# EAGLE board 5x5_printout (EAGLE 7.2.0)
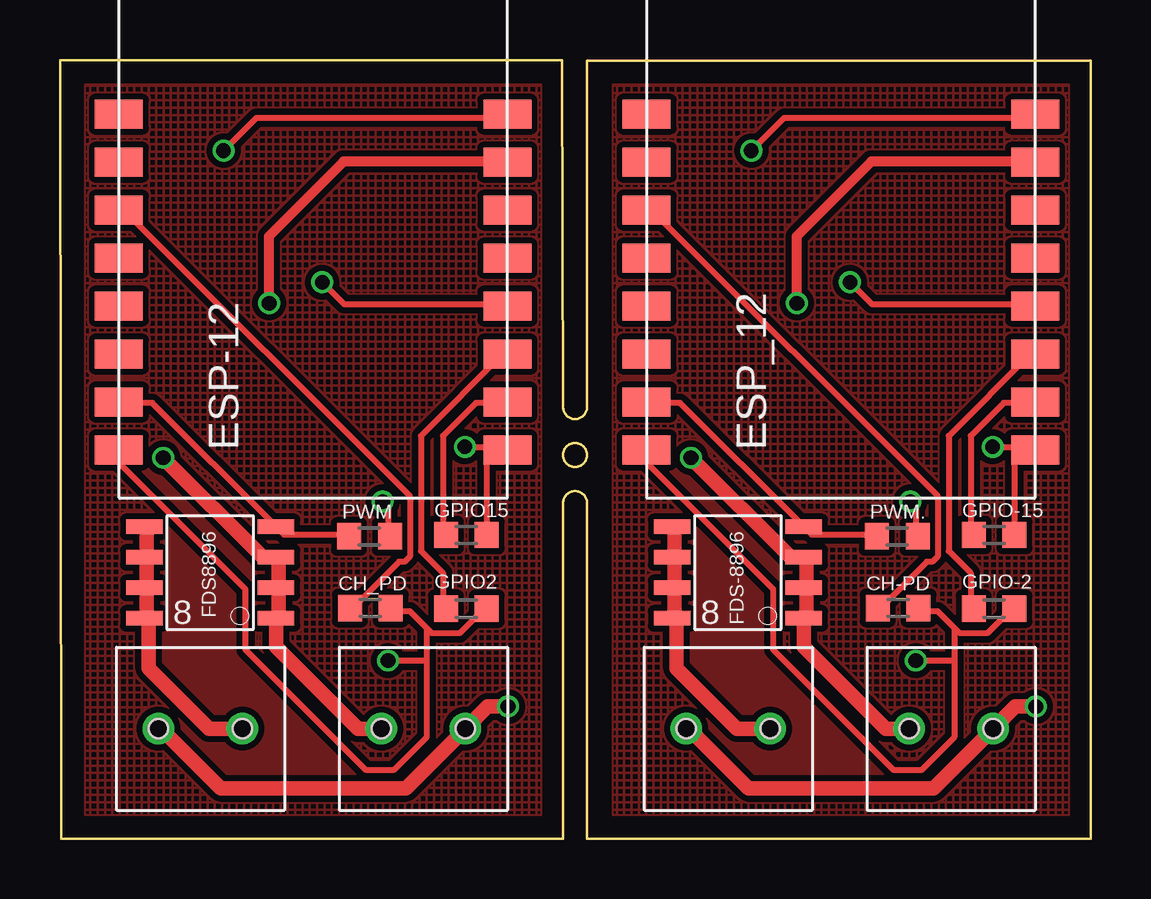
[diagram p0: board, top side]
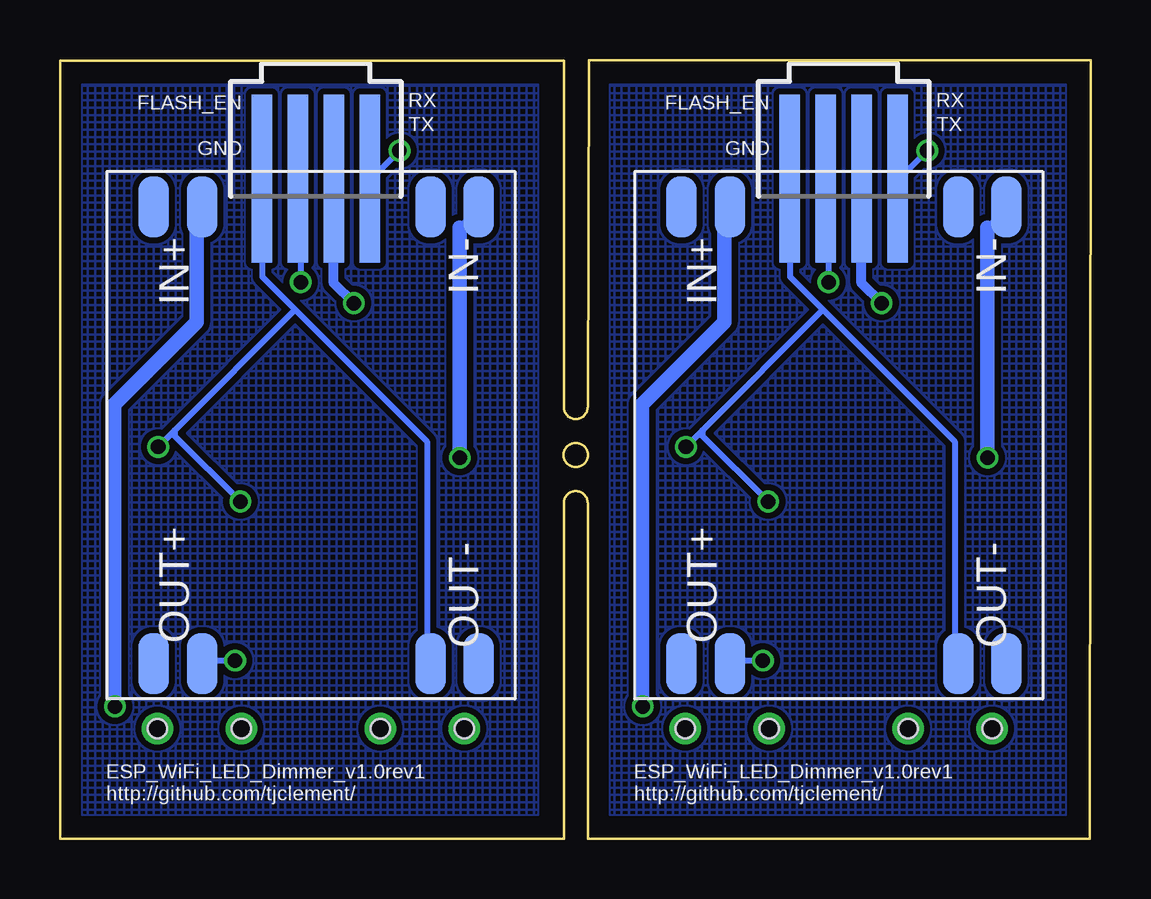
[diagram p1: board, bottom side, seen from below]

Size 42.97 x 32.47 mm. Coordinates in mm from the lower left corner, seen from the top.
Outline: 0.05,0 20.97,0 20.97,14 arc-180 21.97,14 21.97,0 42.97,0 42.97,32.43 21.97,32.43 21.97,18 arc-180 20.97,18 20.92,32.47 0,32.47 0.05,0
Outline: circle at 21.47,16 radius 0.5
Copper layers (1*16): Top 0.035mm / dielectric 1.5mm / Bottom 0.035mm
Design rules "dirt_cheap_dirty_boards.v1": minimum track width 5mil, minimum drill 12mil, track to track 5mil, track to pad 5mil, pad to pad 5mil, via to via 5mil, smd to smd 0mil, copper to edge 10mil, drill to drill 10mil, minimum pad ring 10mil, minimum via ring 6mil, stop-mask expansion 2mil, vias tented up to drill 25mil, thermal gap 10mil

## Footprints (pad centres in the part's own frame; a part is rotated, then mirrored left to right if it is on the bottom)
KF350-2P = drill 0.8: 1 -1.75,0; 2 1.75,0 | hole 0.8: -1.75,0; 1.75,0
R0603 = smd 1 x 1.1: 1 -0.85,0; 2 0.85,0
CN1594 = smd 2.54 x 1.27: IN+(1) -9.525,-4.547; IN+(2) -9.525,-6.553; IN-(1) -9.525,6.985; IN-(2) -9.525,4.978; OUT+(1) 9.525,-4.547; OUT+(2) 9.525,-6.553; OUT-(1) 9.525,6.985; OUT-(2) 9.525,4.978
ESP8266-ESP12 = smd 2 x 1.2: 1 16.2,2; 2 16.2,4; 3 16.2,6; 4 16.2,8; 5 16.2,10; 6 16.2,12; 7 16.2,14; 8 16.2,16; 9 0,16; 10 0,14; 11 0,12; 12 0,10; 13 0,8; 14 0,6; 15 0,4; 16 0,2
SO-8 = smd 1.524 x 0.61: 1 -2.743,1.905; 2 -2.743,0.635; 3 -2.743,-0.635; 4 -2.743,-1.905; 5 2.743,-1.905; 6 2.743,-0.635; 7 2.743,0.635; 8 2.743,1.905
87438-04 = smd 7 x 0.85: 1 0,2.25; 2 0,0.75; 3 0,-0.75; 4 0,-2.25

## Placement (x,y rotation side)
12V_IN  KF350-P2  [KF350-2P]  15.15,4.59 0 top
12V_IN1  KF350-P2  [KF350-2P]  37.15,4.59 0 top
CH-PD  10k  [R0603]  34.94,9.62 0 top
CH_PD  10k  [R0603]  12.94,9.62 0 top
DC_CONVERTER  CN1594THROUGH-HOLE  [CN1594]  10.51,16.82 270 bottom
DC_CONVERTER1  CN1594THROUGH-HOLE  [CN1594]  32.5,16.82 270 bottom
ESP-12  ESP8266_ESP-12  [ESP8266-ESP12]  2.45,14.21 0 top
ESP_12  ESP8266_ESP-12  [ESP8266-ESP12]  24.45,14.21 0 top
FDS8896  [SO-8]  6.26,11.1 180 top
FDS-8896  [SO-8]  28.26,11.1 180 top
GPIO2  10k  [R0603]  16.94,9.6 0 top
GPIO15  10k  [R0603]  16.94,12.67 0 top
GPIO-2  10k  [R0603]  38.94,9.6 0 top
GPIO-15  10k  [R0603]  38.94,12.67 0 top
LED  KF350-P2  [KF350-2P]  5.86,4.59 0 top
LED1  KF350-P2  [KF350-2P]  27.86,4.59 0 top
PROG  [87438-04]  10.31,27.53 270 bottom  (not fitted)
PROG1  [87438-04]  32.3,27.53 270 bottom  (not fitted)
PWM  10k  [R0603]  12.9,12.61 0 top
PWM.  10k  [R0603]  34.9,12.61 0 top

## Library data of the parts
12V_IN 12V_IN1 LED LED1 = KF350-P2
CH-PD CH_PD GPIO2 GPIO15 GPIO-2 GPIO-15 PWM PWM. = rcl
DC_CONVERTER DC_CONVERTER1 = CN1594_smd
ESP-12 ESP_12 = ESP8266-ESP12
FDS8896 FDS-8896 = transistor-fet
PROG PROG1 = con-molex; OC_FARNELL: unknown; OC_NEWARK: unknown

## Nets
N$1: CH_PD.2 DC_CONVERTER.OUT+(1) ESP-12.16 GPIO2.2
N$2: CH_PD.1 ESP-12.11
N$3: ESP-12.3 GPIO2.1
N$4: FDS8896.5 FDS8896.6 FDS8896.7 FDS8896.8 LED.2
N$5: ESP-12.8 PROG.1
N$6: DC_CONVERTER.OUT-(2) ESP-12.1 GPIO15.2 PROG.4 PWM.2
N$7: ESP-12.2 GPIO15.1
N$8: ESP-12.7 PROG.2
N$9: ESP-12.4 PROG.3
N$10: 12V_IN.1 DC_CONVERTER.IN-(1) FDS8896.1 FDS8896.2 FDS8896.3
N$11: CH-PD.2 DC_CONVERTER1.OUT+(1) ESP_12.16 GPIO-2.2
N$12: 12V_IN.2 DC_CONVERTER.IN+(1) LED.1
N$13: CH-PD.1 ESP_12.11
N$14: ESP_12.3 GPIO-2.1
N$15: DC_CONVERTER1.OUT-(2) ESP_12.1 GPIO-15.2 PROG1.4 PWM..2
N$16: ESP_12.2 GPIO-15.1
N$17: FDS-8896.5 FDS-8896.6 FDS-8896.7 FDS-8896.8 LED1.2
N$18: 12V_IN1.1 DC_CONVERTER1.IN-(1) FDS-8896.1 FDS-8896.2 FDS-8896.3
N$19: 12V_IN1.2 DC_CONVERTER1.IN+(1) LED1.1
N$20: ESP_12.8 PROG1.1
N$21: ESP_12.7 PROG1.2
N$22: ESP_12.4 PROG1.3
S$2: ESP-12.15 FDS8896.4 PWM.1
S$6: ESP_12.15 FDS-8896.4 PWM..1

## Tracks (layer width: path | path; a pad name or v marks a point on that pad's centre or on a via)
N$1  (via drill 0.61)
  Top 0.254: 15.28,8.8 15.51,8.57 16.65,8.57 17.56,9.49 GPIO2.2 | 15.28,8.8 14.59,9.49 13.91,9.49 CH_PD.2 | 15.28,8.8 15.28,7.43 | 15.28,7.43 15.28,4.23 13.91,2.86 12.76,2.86 7.73,7.88 7.73,10.4 2.47,15.66 2.47,16.11 ESP-12.16 | 15.28,7.43 v13.68,7.43
  Bottom 0.254: v13.68,7.43 15.05,7.43 DC_CONVERTER.OUT+(1)
N$2
  Top 0.254: CH_PD.1 12.31,9.71 14.13,11.54 14.36,11.54 14.59,11.77 14.59,14.29 2.47,26.4 ESP-12.11
N$3
  Top 0.254: GPIO2.1 15.96,9.71 15.96,11.09 15.05,12 15.05,16.8 18.48,20.23 ESP-12.3
N$4
  Top 0.254: 3.62,9.26 FDS8896.8 | 3.62,10.4 FDS8896.7 3.62,10.63 | 3.62,11.54 FDS8896.6 3.62,11.77 | 3.62,12.91 FDS8896.5
  Top 0.61: 3.62,10.4 3.62,9.26 | 3.62,10.63 3.62,11.54 | 3.62,11.77 3.62,12.91 | LED.2 6.22,4.59 3.7,7.11 3.7,9.01 FDS8896.8
N$5  (via drill 0.61)
  Top 0.254: v6.82,28.69 8.19,30.06 18.48,30.06 ESP-12.8
  Bottom 0.254: v6.82,28.69 7.96,27.55 PROG.1
N$6  (via drill 0.61)
  Top 0.254: v16.88,16.34 17.79,16.34 | 17.79,16.34 18.48,16.34 ESP-12.1 17.79,16.34 | 17.79,16.34 17.79,12.69 GPIO15.2 | v13.45,14.06 13.68,13.83 13.68,12.69 PWM.2
  Bottom 0.254: 11.16,22.06 12.53,23.43 12.53,27.32 PROG.4 | 11.16,22.06 5.68,16.57 5.68,7.43 DC_CONVERTER.OUT-(2) | 11.16,22.06 16.19,17.03 | 16.19,17.03 v16.88,16.34 | v13.45,14.06 16.19,16.8 16.19,17.03
N$7
  Top 0.254: GPIO15.1 15.96,12.69 15.96,16.8 17.33,18.17 18.48,18.17 ESP-12.2
N$8  (via drill 0.61)
  Top 0.254: 18.48,28.23 ESP-12.7
  Top 0.406: 18.48,28.23 11.82,28.23 8.7,25.11 8.7,22.35 v8.72,22.33
  Bottom 0.254: 9.56,30.52 9.56,27.55 PROG.2
  Bottom 0.406: v8.72,22.33 9.56,23.17 PROG.2
N$9  (via drill 0.61)
  Top 0.254: v10.93,23.2 11.85,22.29 18.48,22.29 ESP-12.4
  Bottom 0.254: v10.93,23.2 10.93,27.32 PROG.3
N$10  (via drill 0.61)
  Top 0.254: 9.11,9.26 FDS8896.1 | 9.11,10.4 FDS8896.2 9.11,10.63 | 9.11,11.54 FDS8896.3 8.88,11.77 8.42,11.77
  Top 0.61: 9.11,10.4 9.11,9.26 | 9.11,10.63 9.11,11.54 | v4.3,15.89 8.42,11.77 | 12V_IN.1 12.42,4.59 9,8.01 FDS8896.1
  Bottom 0.254: 4.3,25.49 3.62,26.17 DC_CONVERTER.IN-(1)
  Bottom 0.61: 4.3,25.49 v4.3,15.89
N$11  (via drill 0.61)
  Top 0.254: 37.28,8.8 37.51,8.57 38.65,8.57 39.56,9.49 GPIO-2.2 | 37.28,8.8 36.59,9.49 35.9,9.49 CH-PD.2 | 37.28,8.8 37.28,7.43 | 37.28,7.43 37.28,4.23 35.9,2.86 34.76,2.86 29.73,7.88 29.73,10.4 24.48,15.66 24.48,16.11 ESP_12.16 | 37.28,7.43 v35.68,7.43
  Bottom 0.254: v35.68,7.43 37.05,7.43 DC_CONVERTER1.OUT+(1)
N$12  (via drill 0.61)
  Top 0.61: LED.1 4.22,4.59 6.7,2.11 14.42,2.11 12V_IN.2 17.82,5.51 v18.68,5.51
  Bottom 0.254: 15.28,26.17 DC_CONVERTER.IN+(1)
  Bottom 0.61: 15.28,26.17 15.28,21.53 18.7,18.11 18.7,5.74 v18.68,5.51
N$13
  Top 0.254: CH-PD.1 34.3,9.71 36.13,11.54 36.36,11.54 36.59,11.77 36.59,14.29 24.48,26.4 ESP_12.11
N$14
  Top 0.254: GPIO-2.1 37.96,9.71 37.96,11.09 37.05,12 37.05,16.8 40.48,20.23 ESP_12.3
N$15  (via drill 0.61)
  Top 0.254: v38.88,16.34 39.79,16.34 | 39.79,16.34 40.48,16.34 ESP_12.1 39.79,16.34 | 39.79,16.34 39.79,12.69 GPIO-15.2 | v35.45,14.06 35.68,13.83 35.68,12.69 PWM..2
  Bottom 0.254: 33.16,22.06 34.53,23.43 34.53,27.32 PROG1.4 | 33.16,22.06 27.68,16.57 27.68,7.43 DC_CONVERTER1.OUT-(2) | 33.16,22.06 38.19,17.03 | 38.19,17.03 v38.88,16.34 | v35.45,14.06 38.19,16.8 38.19,17.03
N$16
  Top 0.254: GPIO-15.1 37.96,12.69 37.96,16.8 39.33,18.17 40.48,18.17 ESP_12.2
N$17
  Top 0.254: 25.62,9.26 FDS-8896.8 | 25.62,10.4 FDS-8896.7 25.62,10.63 | 25.62,11.54 FDS-8896.6 25.62,11.77 | 25.62,12.91 FDS-8896.5
  Top 0.61: 25.62,10.4 25.62,9.26 | 25.62,10.63 25.62,11.54 | 25.62,11.77 25.62,12.91 | LED1.2 28.22,4.59 25.7,7.11 25.7,9.01 FDS-8896.8
N$18  (via drill 0.61)
  Top 0.254: 31.11,9.26 FDS-8896.1 | 31.11,10.4 FDS-8896.2 31.11,10.63 | 31.11,11.54 FDS-8896.3 30.88,11.77 30.42,11.77
  Top 0.61: 31.11,10.4 31.11,9.26 | 31.11,10.63 31.11,11.54 | v26.3,15.89 30.42,11.77 | 12V_IN1.1 34.42,4.59 31,8.01 FDS-8896.1
  Bottom 0.254: 26.3,25.49 25.62,26.17 DC_CONVERTER1.IN-(1)
  Bottom 0.61: 26.3,25.49 v26.3,15.89
N$19  (via drill 0.61)
  Top 0.61: LED1.1 26.22,4.59 28.7,2.11 36.42,2.11 12V_IN1.2 39.82,5.51 v40.68,5.51
  Bottom 0.254: 37.28,26.17 DC_CONVERTER1.IN+(1)
  Bottom 0.61: 37.28,26.17 37.28,21.53 40.7,18.11 40.7,5.74 v40.68,5.51
N$20  (via drill 0.61)
  Top 0.254: v28.82,28.69 30.19,30.06 40.48,30.06 ESP_12.8
  Bottom 0.254: v28.82,28.69 29.96,27.55 PROG1.1
N$21  (via drill 0.61)
  Top 0.254: 40.48,28.23 ESP_12.7
  Top 0.406: 40.48,28.23 33.82,28.23 30.7,25.11 30.7,22.35 v30.72,22.33
  Bottom 0.254: 31.56,30.52 31.56,27.55 PROG1.2
  Bottom 0.406: v30.72,22.33 31.55,23.17 PROG1.2
N$22  (via drill 0.61)
  Top 0.254: v32.93,23.2 33.85,22.29 40.48,22.29 ESP_12.4
  Bottom 0.254: v32.93,23.2 32.93,27.32 PROG1.3
S$1
  pour Top (isolate 0.254, hatched): 1.05,31.43 20.05,31.43 20.05,1 1.05,1
  pour Bottom (isolate 0.254, hatched): 1.05,31.43 20.05,31.43 20.05,1 1.05,1
S$2
  Top 0.254: PWM.1 11.85,12.69 9.33,12.69 9.11,12.91 FDS8896.4 8.88,13.14 3.85,18.17 2.47,18.17 ESP-12.15
S$3
  pour Top (isolate 0.254, hatched): 23.05,31.43 42.05,31.43 42.05,1 23.05,1
  pour Bottom (isolate 0.254, hatched): 23.05,31.43 42.05,31.43 42.05,1 23.05,1
S$4
  pour Top (isolate 0.254): 8.05,11 8.05,12 4.05,16 3.05,15 7.05,11
S$5
  pour Top (isolate 0.254): 5.05,13 4.05,13 4.05,6 5.05,5 5.05,4 6.05,3 7.05,2 13.05,2 8.05,7 8.05,10
S$6
  Top 0.254: PWM..1 33.85,12.69 31.33,12.69 31.11,12.91 FDS-8896.4 30.88,13.14 25.85,18.17 24.48,18.17 ESP_12.15
S$7
  pour Top (isolate 0.254): 27.05,13 26.05,13 26.05,6 27.05,5 27.05,4 28.05,3 29.05,2 35.05,2 30.05,7 30.05,10
S$8
  pour Top (isolate 0.254): 30.05,11 30.05,12 26.05,16 25.05,15 29.05,11

## Text on the board
bNames: RX | TX | FLASH_EN | RX | TX | FLASH_EN | GND | GND | ESP_WiFi_LED_Dimmer_v1.0rev1 / http://github.com/tjclement/ | ESP_WiFi_LED_Dimmer_v1.0rev1 / http://github.com/tjclement/